# Altium PCB PCB2.PcbDoc
Units mm, origin at the board's own origin, x right, y up, seen from the top; angles counter-clockwise.
Board outline 177.64 x 101.09 mm, 2 copper layers (Top Layer, Bottom Layer); 52 components, 47 nets, 222 pads, 51 vias.
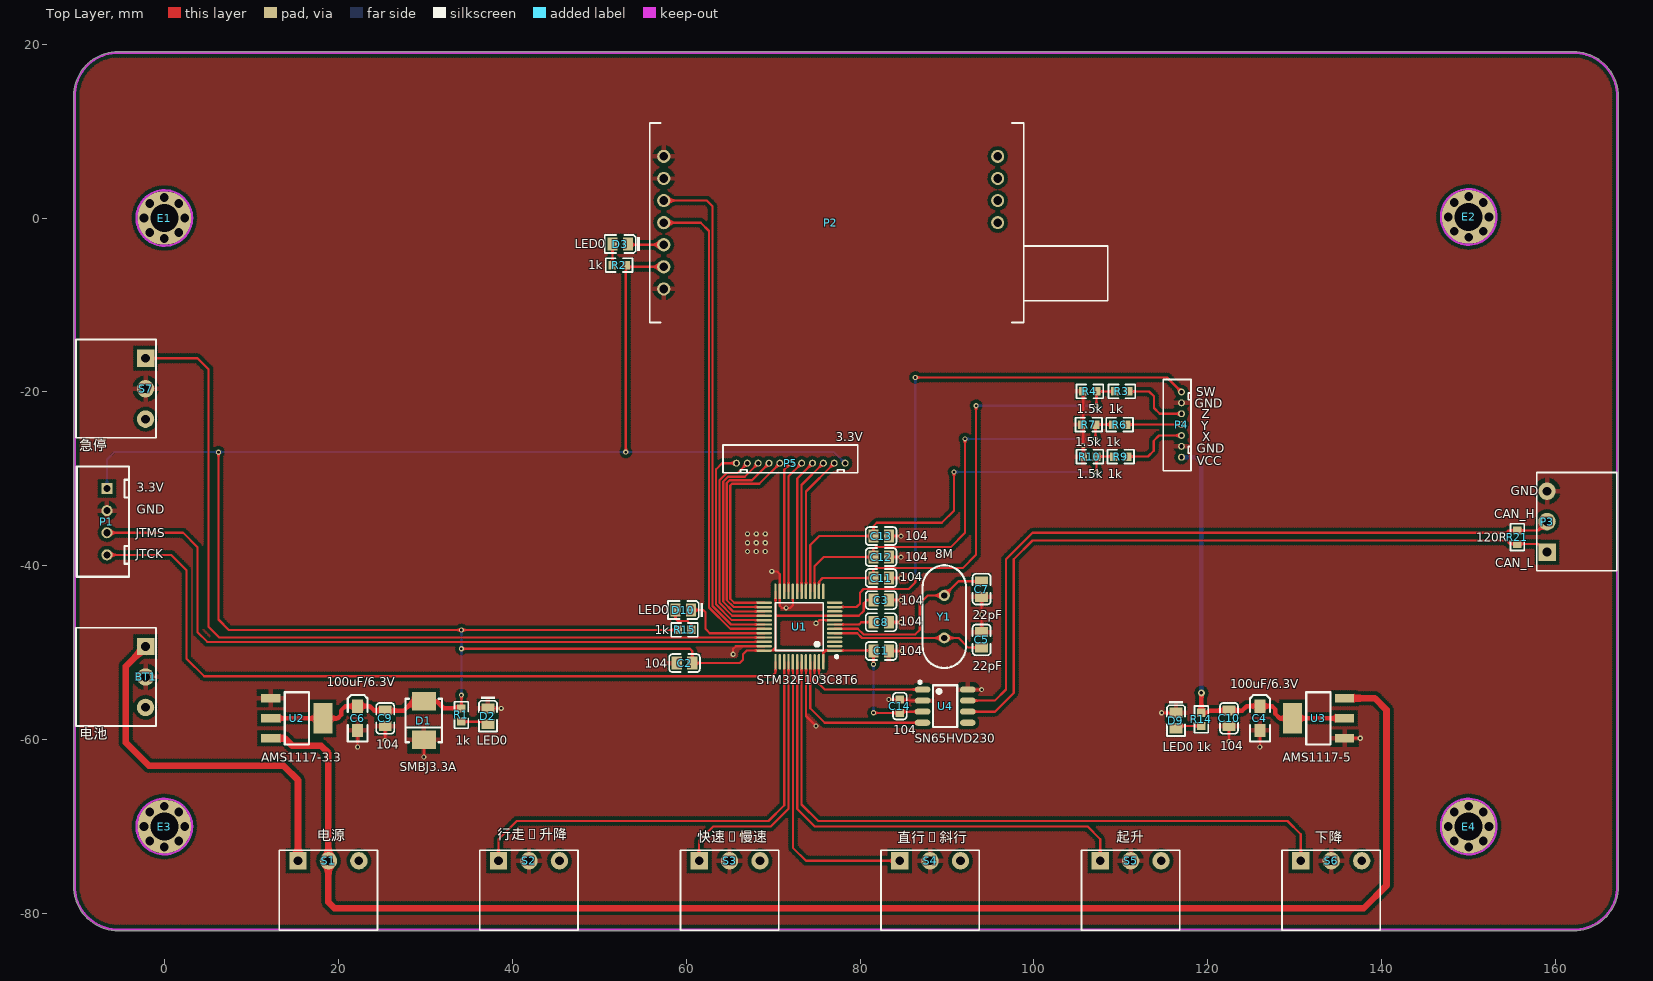
[diagram p0: Top Layer view]
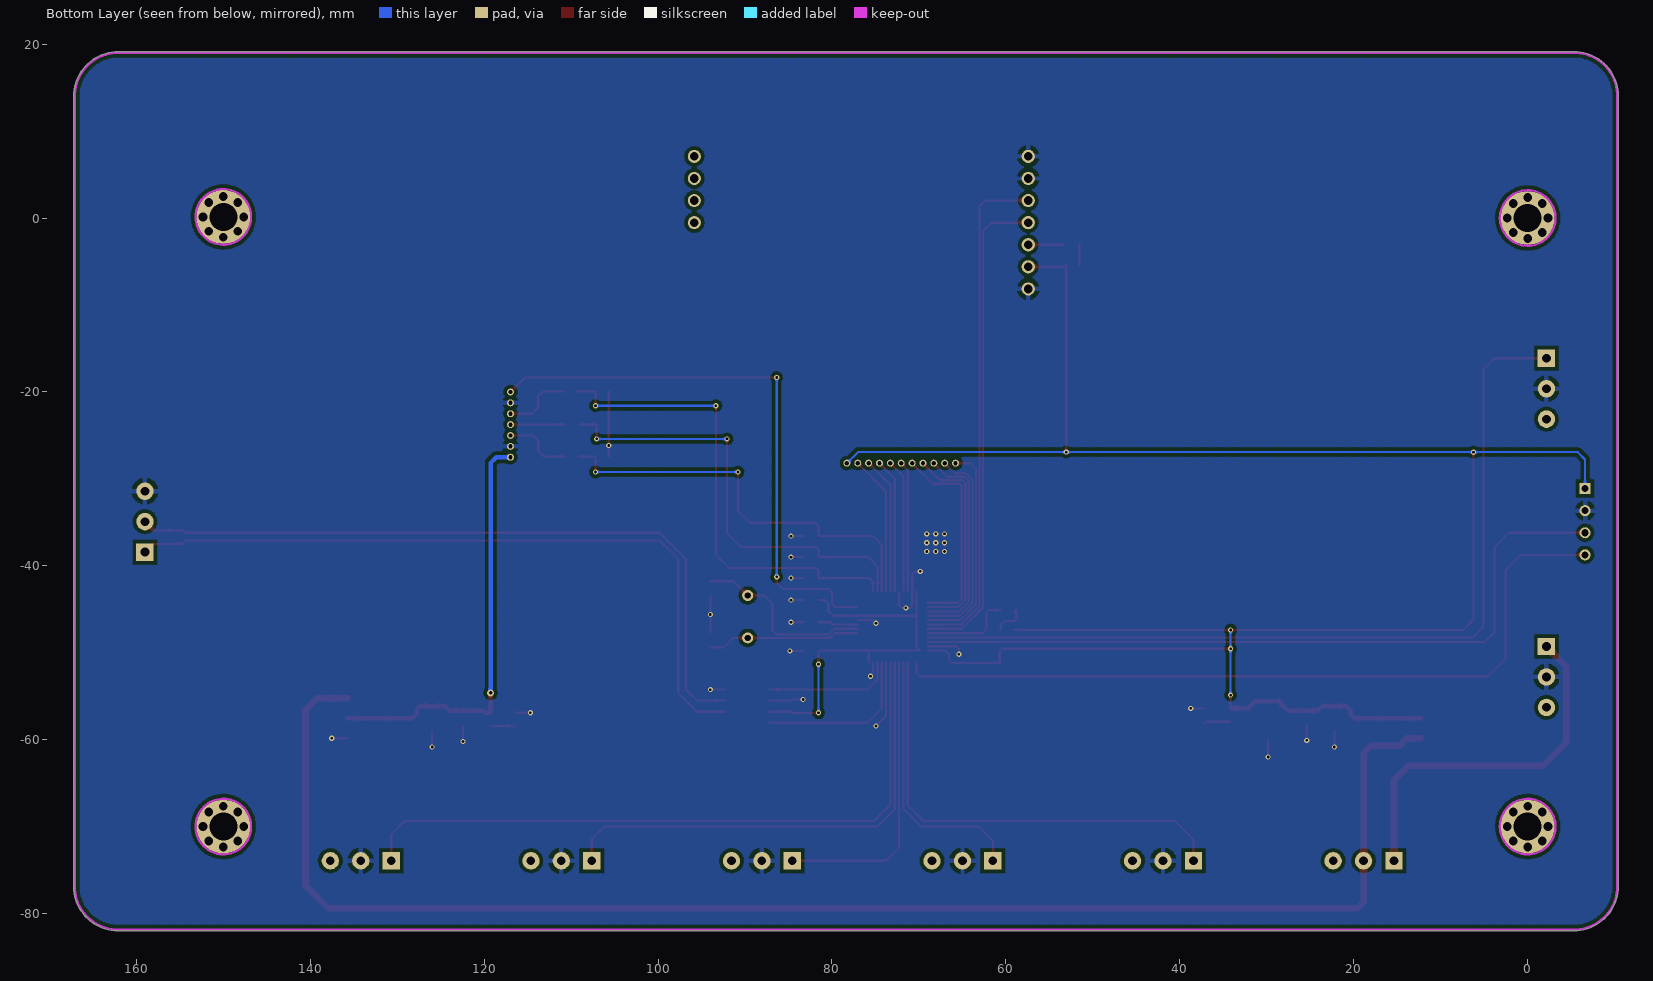
[diagram p1: Bottom Layer view, seen from below]
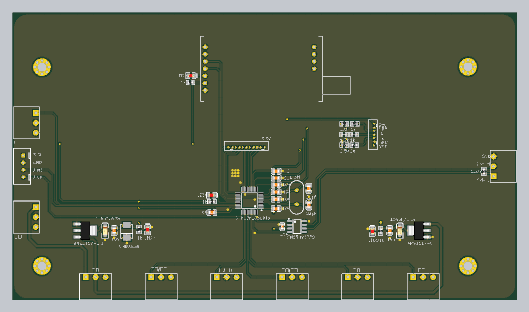
[diagram p2: 3D render of the assembled board from above, using the file's embedded part models]

## Layer stack, top to bottom
Top Solder: solder mask 0.0102, Solder Resist, Dk 3.5
Top Layer: signal copper 0.0356
Dielectric 1: dielectric 0.32, FR-4, Dk 4.8
Bottom Layer: signal copper 0.0356
Bottom Solder: solder mask 0.0102, Solder Resist, Dk 3.5

## Board outline
-10.436,-76.829 cw(c-10.309,-76.828) -10.436,-76.828 -10.436,14.01 cw(c-10.309,14.01) -10.436,14.011 cw(c-5.309,14.01) -5.309,19.137 cw(c-5.309,19.01) -5.308,19.137 162.032,19.137 cw(c162.032,13.962) 167.207,13.962 167.207,-76.889 cw(c167.08,-76.889) 167.207,-76.9 cw(c162.08,-76.828) 162.08,-81.955 -5.309,-81.955 cw(c-5.309,-81.828) -5.311,-81.955 ccw(c-5.309,-76.828) -5.309,-81.955 -5.311,-81.955 cw(c-5.309,-76.828)

## Design rules (kind name [scope] priority, off if disabled: settings)
Clearance Clearance_1 [All vs InPolygon] p1: gap=0.4
Clearance [All] p2: gap=0.152
HoleSize [All] p1: absolutevalues=TRUE maxlimit=5 minlimit=0.025 maxpercent=80.000 minpercent=20.000
MinimumSolderMaskSliver [All] p1: minsoldermaskwidth=0.076
PolygonConnect PolygonConnect_1 [All vs IsVia] p1: connectstyle=Direct reliefconductorwidth=0.254 reliefentries=4 polygonreliefangle="90 Angle" airgapwidth=0.254
PolygonConnect [All] p2: connectstyle=Relief reliefconductorwidth=0.508 reliefentries=4 polygonreliefangle="90 Angle" airgapwidth=0.508
RoutingVias [All] p1: holewidth=0.711 width=1.27 viastyle="Through Hole" minholewidth=0.711 minwidth=1.27 maxholewidth=0.711 maxwidth=1.27
SolderMaskExpansion [All] p1: expansion=0.102
Width [All] p1: maxlimit=0.762 minlimit=0.152 preferedwidth=0.254
28 further rules are at their usual default settings.

## Components (designator, comment, footprint, x,y, rotation, side; value= is the part's Value field where it differs from the comment)
BT1 "电池" DZ-3-3.5 -2.159,-49.276 r270 top
C1 "104" 0805_C 82.423,-49.784 r0 top
C2 "104" 0805_C 59.817,-51.181 r180 top
C3 "104" 0805_C 82.423,-43.942 r0 top
C4 "100uF/6.3V" 3216 125.984,-57.531 r90 top
C5 "22pF" 0805_C 93.98,-48.514 r90 top
C6 "100uF/6.3V" 3216 22.225,-57.531 r90 top
C7 "22pF" 0805_C 93.98,-42.672 r270 top
C8 "104" 0805_C 82.423,-46.482 r0 top
C9 "104" 0805_C 25.4,-57.531 r90 top
C10 "104" 0805_C 122.428,-57.531 r90 top
C11 "104" 0805_C 82.423,-41.402 r180 top
C12 "104" 0805_C 82.423,-38.989 r0 top
C13 "104" 0805_C 82.423,-36.576 r0 top
C14 "104" 0603_C 84.582,-56.134 r90 top
D1 "SMBJ3.3A" SMB(DO-214AA)_S1 29.845,-57.785 r90 top
D2 "LED0" LC-0805_LED_S1 37.211,-58.166 r270 top
D3 "LED0" LC-0805_LED_S1 51.537,-2.997 r180 top
D9 "LED0" LC-0805_LED_S1 116.332,-58.674 r270 top
D10 "LED0" LC-0805_LED_S1 58.801,-45.085 r180 top
E1 "Antenna" "定位孔 Φ3.2" 0,0 r0 top
E2 "Antenna" "定位孔 Φ3.2" 149.987,0.127 r0 top
E3 "Antenna" "定位孔 Φ3.2" 0,-69.977 r0 top
E4 "Antenna" "定位孔 Φ3.2" 149.987,-69.977 r0 top
P1 "Header 4" IDE4 -6.604,-31.115 r270 top
P2 "Header 7" AS50-T27 57.429,-8.153 r0 top
P3 "Header 3" DZ-3-3.5 159.004,-38.417 r90 top
P4 "Header 7" XH7 116.967,-27.508 r90 top
P5 "Header 11" XH11 65.786,-28.194 r0 top
R1 "1k" 0603_R 34.163,-57.15 r270 top
R2 "1k" 0603_R 52.299,-5.41 r180 top
R3 "1k" 0603_R 110.109,-19.939 r180 top
R4 "1.5k" 0603_R 106.426,-19.939 r180 top
R6 "1k" 0603_R 109.855,-23.749 r180 top
R7 "1.5k" 0603_R 106.299,-23.749 r180 top
R9 "1k" 0603_R 109.982,-27.432 r180 top
R10 "1.5k" 0603_R 106.426,-27.432 r180 top
R14 "1k" 0603_R 119.253,-57.658 r270 top
R15 "1k" 0603_R 59.817,-47.371 r0 top
R21 "120R" 0603_R 155.575,-36.703 r90 top
S1 "电源" DZ-3-3.5 15.367,-73.914 r0 top
S2 "行走/升降" DZ-3-3.5 38.43,-73.914 r0 top
S3 "快速/慢速" DZ-3-3.5 61.493,-73.914 r0 top
S4 "直行/斜行" DZ-3-3.5 84.557,-73.914 r0 top
S5 "起升" DZ-3-3.5 107.62,-73.914 r0 top
S6 "下降" DZ-3-3.5 130.683,-73.914 r0 top
S7 "急停" DZ-3-3.5 -2.159,-16.129 r270 top
U1 "STM32F103C8T6" LQFP-48_7x7x05P 73.025,-46.99 r90 top
U2 "AMS1117-3.3" LC-SOT-223 15.24,-57.531 r180 top
U3 "AMS1117-5" LC-SOT-223 132.715,-57.531 r0 top
U4 "SN65HVD230" LC-SOIC-8_150mil 89.789,-56.134 r270 top
Y1 "8M" XTAL_US 89.687,-48.285 r90 top

## Footprints (in the part's own frame and the unit in brackets; to place one, negate y for a bottom-side part, rotate by r counter-clockwise, add the part's x,y. Pads: shape width x height; smd on the part's side, far side on the other; paste and mask are expansions set on the pad)
0603_C [mm]
  rect 0.93x0.98 smd: 1(-0.77,0) 2(0.77,0)
  silkscreen extent -1.53,-0.79 1.54,0.79, body extent -0.8,-0.4 0.8,0.4, height 0.3
0603_R [mm]
  rect 0.93x0.98 smd: 1(-0.77,0) 2(0.77,0)
  silkscreen extent -1.53,-0.79 1.54,0.79, body extent -0.85,-0.4 0.85,0.4, height 0.56
0805_C [mm]
  rect 1.16x1.47 smd: 1(-0.89,0) 2(0.89,0)
  silkscreen extent -1.77,-1.04 1.77,1.04, body extent -1,-0.62 1,0.63, height 0.77
3216 [mil]
  rect 60x50 smd: 1(55,0) 2(-55,0)
  silkscreen extent -105,-45 105,45, body extent -65,-31 61,32, height 63
AS50-T27 [mm]
  round 1.5 hole 1: 0(38.4,7.62) 0(38.4,10.16) 0(38.4,12.7) 0(38.4,15.24)
  round 1.524 hole 1: 1(0,0) 2(0,2.54) 3(0,5.08) 4(0,7.62) 5(0,10.16) 6(0,12.7) 7(0,15.24)
  silkscreen extent -1.6,-3.85 51.05,19.09
DZ-3-3.5 [mm]
  rect 2x2 hole 1: 1(0,0)
  round 2 hole 1: 2(3.5,0) 3(7,0)
  silkscreen extent -2.15,-8 9.15,1.2
IDE4 [mil]
  rect 50x50 hole 32: 1(0,0)
  round 50 hole 32: 2(100,0) 3(200,0) 4(300,0)
  silkscreen extent -100,-136 399,100
LC-0805_LED_S1 [mm]
  rect 1.16x1.47 smd: A(0.001,0) K(-1.779,0)
  silkscreen extent -3.13,-1.04 0.88,1.03, body extent -1.9,-0.62 0.12,0.62, height 1.1
LC-SOIC-8_150mil [mm]
  oval 0.7x1.8 smd: 1(-1.905,-2.6) 2(-0.635,-2.6) 3(0.635,-2.6) 4(1.905,-2.6) 5(1.905,2.6) 6(0.635,2.6) 7(-0.635,2.6) 8(-1.905,2.6)
  silkscreen extent -2.9,-3.05 2.4,1.4
LC-SOT-223 [mm]
  rect 2.2x1 smd: 1(3,-2.3) 2(3,0) 3(3,2.3)
  rect 2.2x3.5 smd: 2(-3,0)
  silkscreen extent -1.4,-3 1.4,3, body extent -3.49,-3.24 3.49,3.24, height 1.64
LQFP-48_7x7x05P [mm]
  oval 0.28x1.8 smd mask+0.051: 1(-2.75,-4.05) 2(-2.25,-4.05) 3(-1.75,-4.05) 4(-1.25,-4.05) 5(-0.75,-4.05) 6(-0.25,-4.05) 7(0.25,-4.05) 8(0.75,-4.05) 9(1.25,-4.05) 10(1.75,-4.05) 11(2.25,-4.05) 12(2.75,-4.05) 25(2.75,4.05) 26(2.25,4.05) 27(1.75,4.05) 28(1.25,4.05) 29(0.75,4.05) 30(0.25,4.05) 31(-0.25,4.05) 32(-0.75,4.05) 33(-1.25,4.05) 34(-1.75,4.05) 35(-2.25,4.05) 36(-2.75,4.05)
  oval 1.8x0.28 smd mask+0.051: 13(4.05,-2.75) 14(4.05,-2.25) 15(4.05,-1.75) 16(4.05,-1.25) 17(4.05,-0.75) 18(4.05,-0.25) 19(4.05,0.25) 20(4.05,0.75) 21(4.05,1.25) 22(4.05,1.75) 23(4.05,2.25) 24(4.05,2.75) 37(-4.05,2.75) 38(-4.05,2.25) 39(-4.05,1.75) 40(-4.05,1.25) 41(-4.05,0.75) 42(-4.05,0.25) 43(-4.05,-0.25) 44(-4.05,-0.75) 45(-4.05,-1.25) 46(-4.05,-1.75) 47(-4.05,-2.25) 48(-4.05,-2.75)
  silkscreen extent -3.6,-4.43 2.75,2.75
SMB(DO-214AA)_S1 [mm]
  rect 2.159x2.743 smd: 1(2.21,0) 2(-2.21,0)
  silkscreen extent -2.5,-2.1 2.5,2.1
XH7 [mm] "Connector; Header; 5 Position"
  round 0.8 hole 0.5: 1(0,0) 2(1.25,0) 3(2.5,0) 4(3.75,0) 5(5,0) 6(6.25,0) 7(7.5,0)
  silkscreen extent -1.55,-1.1 8.95,2.1
XH11 [mm] "Connector; Header; 5 Position"
  round 0.8 hole 0.5: 1(0,0) 2(1.25,0) 3(2.5,0) 4(3.75,0) 5(5,0) 6(6.25,0) 7(7.5,0) 8(8.75,0) 9(10,0) 10(11.25,0) 11(12.5,0)
  silkscreen extent -1.55,-1.1 13.95,2.1
XTAL_US [mil]
  round 50 hole 28: 1(0,0) 2(192.13,0)
  silkscreen extent -137,-98 329,98
"定位孔 Φ3.2" [mm]
  round 1 hole 1 unplated: 1(-2.35,0) 1(-1.662,-1.662) 1(-1.662,1.662) 1(0,-2.35) 1(0,2.35) 1(1.662,-1.662) 1(1.662,1.662) 1(2.35,0)
  round 6.2 hole 3.2: 1(0,0)
  Keep-Out Layer circle w0.254: c0,0 r3.2

## Part data
BT1: library part Battery, "Multicell Battery"
C1 C2 C3 C5 C7 C8 C11 C12 C13: library part Cap, "Capacitor"
C4 C6: library part CAP
C9 C10: library part C
C14: library part C_3
D1: library part "Diode 18TQ045", "Schottky Rectifier"
D2 D3 D9 D10: "Typical INFRARED GaAs LED"
E1 E2 E3 E4: "Generic Antenna"
P1: "Header, 4-Pin"
P2 P4: "Header, 7-Pin"
P3: "Header, 3-Pin"
P5: "Header, 11-Pin"
R1 R2 R3 R4 R6 R7 R9 R10 R14 R15 R21: library part R_2
S1 S3 S5: library part SW-SPST, "Single-Pole, Single-Throw Switch"
S2 S4 S6 S7: library part SW-PB, "Switch"
U1: library part stm32f103v8t6
U2 U3: library part AMS1117
U4: library part SN65HVD230D
Y1: library part XTAL, "Crystal Oscillator"

## Via types
v1: diameter 0.6, hole 0.3, Top Layer to Bottom Layer, 48 vias
v2: diameter 1.27, hole 0.711, Top Layer to Bottom Layer, 2 vias
v3: diameter 0.8, hole 0.4, Top Layer to Bottom Layer, 1 vias

## Nets (pads, with @x,y where several pads share a name; then routed paths per layer and width w, separated by ;. In a path a pad name is that pad's centre, name@x,y a point inside that pad or via, vN(x,y) a via of type N, cw(c..) or ccw(c..) an arc to the next point about the centre after c; other vN are vias at no path point)
ADC4: C11.2 R3.2 R4.1 U1.14 | length 55.8
  Top Layer w0.254: U1.14 75.275,-41.819 75.692,-41.402 C11.2 81.533,-40.514 81.788,-40.259 91.821,-40.259 93.345,-38.735 v1(93.345,-21.59) ; v1(107.188,-21.59) R4.1@107.188,-19.947 ; R4.1 R3.2
  Bottom Layer w0.254: v1(93.345,-21.59) v1(107.188,-21.59)
ADC5: C12.1 R6.2 R7.1 U1.15 | length 51.8
  Top Layer w0.254: U1.15 74.775,-40.033 75.819,-38.989 C12.1 81.533,-38.101 81.788,-37.846 90.424,-37.846 92.075,-36.195 v1(92.075,-25.4) ; v1@107.069,-25.392 R7.1 R6.2
  Bottom Layer w0.254: v1(92.075,-25.4) v1(107.061,-25.4)
ADC6: C13.1 R9.2 R10.1 U1.16 | length 48.8
  Top Layer w0.254: U1.16 74.275,-37.612 75.311,-36.576 C13.1 81.533,-35.434 81.915,-35.052 89.408,-35.052 90.805,-33.655 v1(90.805,-29.21) ; v1(107.188,-29.21) 107.196,-29.202 R10.1 R9.2
  Bottom Layer w0.254: v1(90.805,-29.21) v1(107.188,-29.21)
AUX: D3.K P2.3 | length 4.1
  Top Layer w0.254: D3.K D3.K 53.392,-3.073 P2.3
CAN_H: P3.2 R21.2 U4.7 | length 83.9
  Top Layer w0.254: U4.7 95.504,-55.499 96.774,-54.229 96.774,-39.252 99.84,-36.186 154.314,-36.186 154.567,-35.933 R21.2 157.988,-35.933 P3.2
CAN_L: P3.1 R21.1 U4.6 | length 84.3
  Top Layer w0.254: U4.6 95.522,-56.769 97.672,-54.619 97.672,-39.252 99.84,-37.084 154.305,-37.084 154.694,-37.473 R21.1 158.06,-37.473 P3.1
CAN_RX: U1.45 U4.4 | length 18.9
  Top Layer w0.254: U1.45 74.275,-56.368 75.946,-58.039 U4.4
CAN_TX: U1.46 U4.1 | length 14.9
  Top Layer w0.254: U1.46 74.775,-53.058 75.946,-54.229 U4.1
GND: BT1.2 C1.2 C2.2 C3.2 C4.2 C5.2 C6.2 C7.2 C8.2 C9.1 C10.1 C11.1 C12.2 C13.2 C14.2 D1.2 D2.K D9.K P1.2 P2.1 P2.6 P2.7 P3.3 P4.2 P4.6 R4.2 R7.2 R10.2 S2.2 S3.2 S4.2 S5.2 S6.2 S7.2 U1.8 U1.20 U1.23 U1.35 U1.44 U1.47 U2.1 U3.1 U4.2 U4.8 | length 64.1
  Top Layer w0.254: v1(22.225,-60.833) C6.2 ; v1(25.4,-60.071) C9.1 ; v1(29.845,-61.976) D1.2 ; D2.K v1(38.734,-56.387) ; v1(65.405,-50.165) 65.405,-49.53 65.695,-49.24 U1.35 ; v1(69.85,-40.64) 70.485,-40.64 70.775,-40.93 U1.23 70.775,-44.613 70.993,-44.831 72.009,-44.831 72.275,-44.565 U1.20 ; U1.44 73.775,-57.265 v1(74.93,-58.42) ; v1(74.93,-46.609) 75.299,-46.24 U1.8 ; U1.47 75.275,-52.415 v1(75.565,-52.705) ; C1.2 v1(84.836,-49.784) ; C8.2 v1(84.709,-46.482) ; C3.2 v1(84.709,-43.942) ; C11.1 v1(84.709,-41.402) ; C12.2 v1(84.709,-38.989) ; C13.2 v1(84.709,-36.576) ; v1(83.32,-55.364) C14.2 84.717,-55.499 U4.2 ; U4.8 v1(93.98,-54.229) ; C5.2 C7.2 ; R10.2 R4.2 ; v1(114.682,-56.895) D9.K ; v1(122.428,-60.198) C10.1 ; v1(125.984,-60.833) C4.2 ; U3.1 v1(137.527,-59.831)
  other v1: 93.98,-45.593 71.501,-44.831 67.056,-38.354 68.072,-38.354 69.088,-38.354 67.056,-37.338 68.072,-37.338 69.088,-37.338 67.056,-36.322 68.072,-36.322 69.088,-36.322 105.664,-26.162
JTCK: P1.4 U1.37 | length 90
  Top Layer w0.254: P1.4 0.762,-38.735 2.54,-40.513 2.54,-50.673 4.572,-52.705 69.85,-52.705 70.275,-52.28 U1.37
JTMS: P1.3 U1.34 | length 86.5
  Top Layer w0.254: P1.3 2.159,-36.195 3.81,-37.846 3.81,-47.625 4.925,-48.74 U1.34
KEY1: S2.1 U1.39 | length 53.4
  Top Layer w0.254: S2.1 38.43,-71.425 40.513,-69.342 69.469,-69.342 71.275,-67.536 U1.39
KEY2: S4.1 U1.41 | length 34.3
  Top Layer w0.254: U1.41 72.275,-72.402 73.787,-73.914 S4.1
KEY3: S6.1 U1.43 | length 78.3
  Top Layer w0.254: U1.43 73.275,-67.433 75.184,-69.342 129.159,-69.342 130.683,-70.866 S6.1
KEY4: S7.1 U1.33 | length 101.8
  Top Layer w0.254: S7.1 3.81,-16.129 5.08,-17.399 5.08,-46.99 6.33,-48.24 U1.33
KEY_X: P4.3 R9.1 | length 7.9
  Top Layer w0.254: R9.1 113.106,-27.432 113.767,-26.772 113.767,-25.629 114.387,-25.008 P4.3
KEY_Y: P4.4 R6.1 | length 6.3
  Top Layer w0.254: R6.1 116.958,-23.749 P4.4
KEY_Z: P4.5 R3.1 | length 7.9
  Top Layer w0.254: R3.1 113.233,-19.939 113.792,-20.498 113.792,-21.844 114.456,-22.508 P4.5
LED1: P5.1 U1.29 | length 24.5
  Top Layer w0.254: P5.1 64.135,-28.194 63.449,-28.88 63.449,-44.45 65.239,-46.24 U1.29
LED2: P5.2 U1.28 | length 23.9
  Top Layer w0.254: P5.2 65.893,-29.337 64.643,-29.337 63.856,-30.124 63.856,-44.282 65.314,-45.74 U1.28
LED3: P5.3 U1.27 | length 23.9
  Top Layer w0.254: P5.3 66.737,-29.743 64.811,-29.743 64.262,-30.293 64.262,-44.113 65.389,-45.24 U1.27
LED4: P5.4 U1.26 | length 23.9
  Top Layer w0.254: U1.26 65.466,-44.74 64.668,-43.942 64.668,-30.461 64.98,-30.15 67.58,-30.15 P5.4
LED5: P5.5 U1.25 | length 23.9
  Top Layer w0.254: U1.25 65.541,-44.24 65.075,-43.774 65.075,-30.759 65.278,-30.556 68.424,-30.556 P5.5
LED6: P5.6 U1.22 | length 15.1
  Top Layer w0.254: U1.22 71.275,-28.955 P5.6
LED7: P5.7 U1.21 | length 15.4
  Top Layer w0.254: U1.21 71.775,-29.705 P5.7
LED8: P5.8 U1.19 | length 15.5
  Top Layer w0.254: U1.19 72.775,-29.955 P5.8
LED9: P5.9 U1.18 | length 15.8
  Top Layer w0.254: U1.18 73.275,-30.705 P5.9
LED10: P5.10 U1.17 | length 16.1
  Top Layer w0.254: U1.17 73.775,-31.455 P5.10
NetC5_1: C5.1 U1.5 Y1.1 | length 17.6
  Top Layer w0.254: U1.5 79.677,-47.74 80.223,-48.285 Y1.1 91.338,-48.285 92.457,-49.404 C5.1
NetC7_1: C7.1 U1.6 Y1.2 | length 21.6
  Top Layer w0.254: U1.6 79.752,-47.24 80.391,-47.879 86.36,-47.879 86.868,-47.371 86.868,-44.323 87.786,-43.405 Y1.2 91.311,-41.782 C7.1 ; Y1.2@89.687,-43.507 Y1.2@89.789,-43.507
NetC8_1: C8.1 U1.7 | length 4.6
  Top Layer w0.254: U1.7 79.879,-46.74 80.137,-46.482 C8.1
NetD2_A: D2.A R1.2 | length 3.2
  Top Layer w0.254: R1.2 36.964,-57.92 D2.A
NetD3_A: D3.A R2.2 | length 2.4
  Top Layer w0.254: R2.2@51.536,-5.403 R2.2 51.529,-3.004 D3.A
NetD9_A: D9.A R14.2 | length 3
  Top Layer w0.254: D9.A 116.579,-58.428 R14.2
NetD10_A: D10.A R15.2 | length 4
  Top Layer w0.254: D10.A@59.047,-45.332 D10.A 58.8,-46.1 59.055,-46.355 60.198,-46.355 60.587,-46.744 R15.2
NetD10_K: D10.K U1.32 | length 10.6
  Top Layer w0.254: D10.K 61.976,-45.085 62.23,-45.339 62.23,-47.244 62.726,-47.74 U1.32
NetS1_2: S1.2 U2.3 U3.3 | length 173.1
  Top Layer w0.762: U2.3 13.857,-59.831 14.732,-60.706 18.034,-60.706 18.867,-61.539 S1.2 18.867,-78.684 19.558,-79.375 137.922,-79.375 140.538,-76.759 140.538,-56.566 139.203,-55.231 U3.3
PA2_U2_TX: U1.12
PA3_U2_RX: U1.13
SW1: S3.1 U1.40 | length 31
  Top Layer w0.254: S3.1 61.493,-71.603 63.119,-69.977 69.723,-69.977 71.775,-67.925 U1.40
SW2: S5.1 U1.42 | length 55.7
  Top Layer w0.254: U1.42 72.775,-67.949 74.803,-69.977 106.172,-69.977 107.62,-71.425 S5.1
SW3: P4.7 U1.11 | length 66.1
  Top Layer w0.254: U1.11 79.593,-44.74 80.01,-44.323 80.01,-43.053 80.391,-42.672 85.598,-42.672 86.36,-41.91 v1(86.36,-41.275) ; v1(86.36,-18.339) 115.298,-18.339 P4.7
  Bottom Layer w0.254: v1(86.36,-41.275) v1(86.36,-18.339)
U1_RX: P2.4 U1.31 | length 56.2
  Top Layer w0.254: P2.4 61.671,-0.533 62.636,-1.499 62.636,-44.787 65.09,-47.24 U1.31
U1_TX: P2.5 U1.30 | length 58.7
  Top Layer w0.254: P2.5 62.382,2.007 63.043,1.346 63.043,-44.618 65.164,-46.74 U1.30
VCC: C4.1 C10.2 P4.1 R14.1 U3.2 | length 48.9
  Top Layer w0.508: v3(119.253,-54.61) R14.1 119.896,-56.888 120.143,-56.641 C10.2 123.953,-56.641 124.46,-56.134 C4.1 127.381,-56.134 127.762,-56.515 127.762,-57.023 128.27,-57.531 129.715,-57.531 U3.2@135.715,-57.531
  Bottom Layer w0.508: P4.1 118.593,-27.508 119.253,-28.169 v3(119.253,-54.61)
VCC3.3: C1.1 C2.1 C3.1 C6.1 C9.2 C14.1 D1.1 P1.1 P2.2 P5.11 R1.1 R2.1 R15.1 U1.1 U1.9 U1.24 U1.36 U1.48 U2.2 U4.3 | length 302.7
  Top Layer w0.254: v1(6.223,-26.924) 6.223,-46.177 7.417,-47.371 v1(34.163,-47.371) R15.1 ; R1.1 v1(34.163,-54.864) ; v1(34.163,-49.53) 60.452,-49.53 60.707,-49.785 C2.1 66.167,-51.181 66.548,-50.8 66.548,-50.165 66.973,-49.74 U1.36 ; v1(53.069,-26.916) R2.1 ; R2.1@53.272,-5.613 P2.2 ; U1.24 70.275,-49.359 69.894,-49.74 75.99,-49.74 ; 70.295,-45.74 U1.9 79.863,-45.74 80.416,-45.187 80.416,-44.298 80.772,-43.942 C3.1 ; U1.48 75.775,-49.955 75.99,-49.74 ; C1.1@81.489,-49.74 U1.1 75.99,-49.74 ; C1.1 81.542,-49.793 v1(81.542,-51.316) ; v1(81.542,-56.904) C14.1 84.717,-56.769 U4.3
  Top Layer w0.508: U2.2@12.24,-57.531 18.24,-57.531 19.939,-57.531 20.32,-57.15 20.32,-56.642 20.828,-56.134 C6.1 23.622,-56.134 24.129,-56.641 C9.2 27.56,-56.641 28.626,-55.575 D1.1 31.318,-55.575 32.123,-56.38 R1.1
  Bottom Layer w0.254: P1.1 -6.604,-27.762 -5.766,-26.924 77.016,-26.924 P5.11 ; v1(34.163,-54.864) v1(34.163,-49.53) v1(34.163,-47.371) ; v1(81.542,-56.904) v1(81.542,-51.316)
VCC8: BT1.1 S1.1 | length 42.9
  Top Layer w0.762: BT1.1 -4.445,-51.562 -4.445,-60.325 -1.778,-62.992 13.716,-62.992 15.367,-64.643 S1.1
pads on no net: BT1.3 E1.1 E2.1 E3.1 E4.1 P2.0 S1.3 S2.3 S3.3 S4.3 S5.3 S6.3 S7.3 U1.2 U1.3 U1.4 U1.10 U1.38 U4.5
copper on no net:
  other v2: 431.8,165.1 480.822,199.898

## Polygon pours and split planes (outlines as drawn)
GND on Top Layer "Top Layer-No Net" (hatched 90Degree grid 0.203 track 0.203, remove dead copper, pour order 4): -10.795,19.685 167.64,19.685 167.64,-82.55 -10.795,-82.55 -10.795,19.685
GND on Bottom Layer "Top Layer-No Net" (hatched 90Degree grid 0.203 track 0.203, remove dead copper, pour order 3): -10.795,19.685 167.64,19.685 167.64,-82.55 -10.795,-82.55 -10.795,19.685

## Keep-outs
Keep-Out Layer:
  lines w0.254: -5.309,-81.828 162.08,-81.828 ccw(c162.08,-76.828) 167.08,-76.828 ; -5.309,-81.828 cw(c-5.309,-76.828) -10.309,-76.828 -10.309,14.01 cw(c-5.309,14.01) -5.309,19.01 162.032,19.01 cw(c162.032,13.962) 167.08,13.962 167.08,-76.889

## Silkscreen, mask and mechanical layers (free items; w line width, h text height)
Top Overlay:
  text "SW" at 118.669,-20.472 h1
  text "GND" at 118.466,-21.793 h1
  text "Z" at 119.304,-23.038 h1
  text "Y" at 119.253,-24.384 h1
  text "3.3V" at 77.216,-25.654 h1
  text "X" at 119.329,-25.679 h1
  text "GND" at 118.72,-27 h1
  text "VCC" at 118.694,-28.448 h1
  text "3.3V" at -3.175,-31.496 h1
  text "GND" at 154.813,-31.877 h1
  text "GND" at -3.175,-34.036 h1
  text "CAN_H" at 152.908,-34.544 h1
  text "JTMS" at -3.302,-36.703 h1
  text "JTCK" at -3.302,-39.116 h1
  text "CAN_L" at 153.035,-40.132 h1